# Altium PCB EDC_Power_Adapter.PcbDoc
Units mm, origin at the board's own origin, x right, y up, seen from the top; angles counter-clockwise.
Board outline 92.15 x 89.13 mm, 2 copper layers (Top Layer, Bottom Layer), stack 1.571 mm thick; 20 components, 13 nets, 146 pads, 0 vias.
Unrouted connection lines stored in the file: 40.
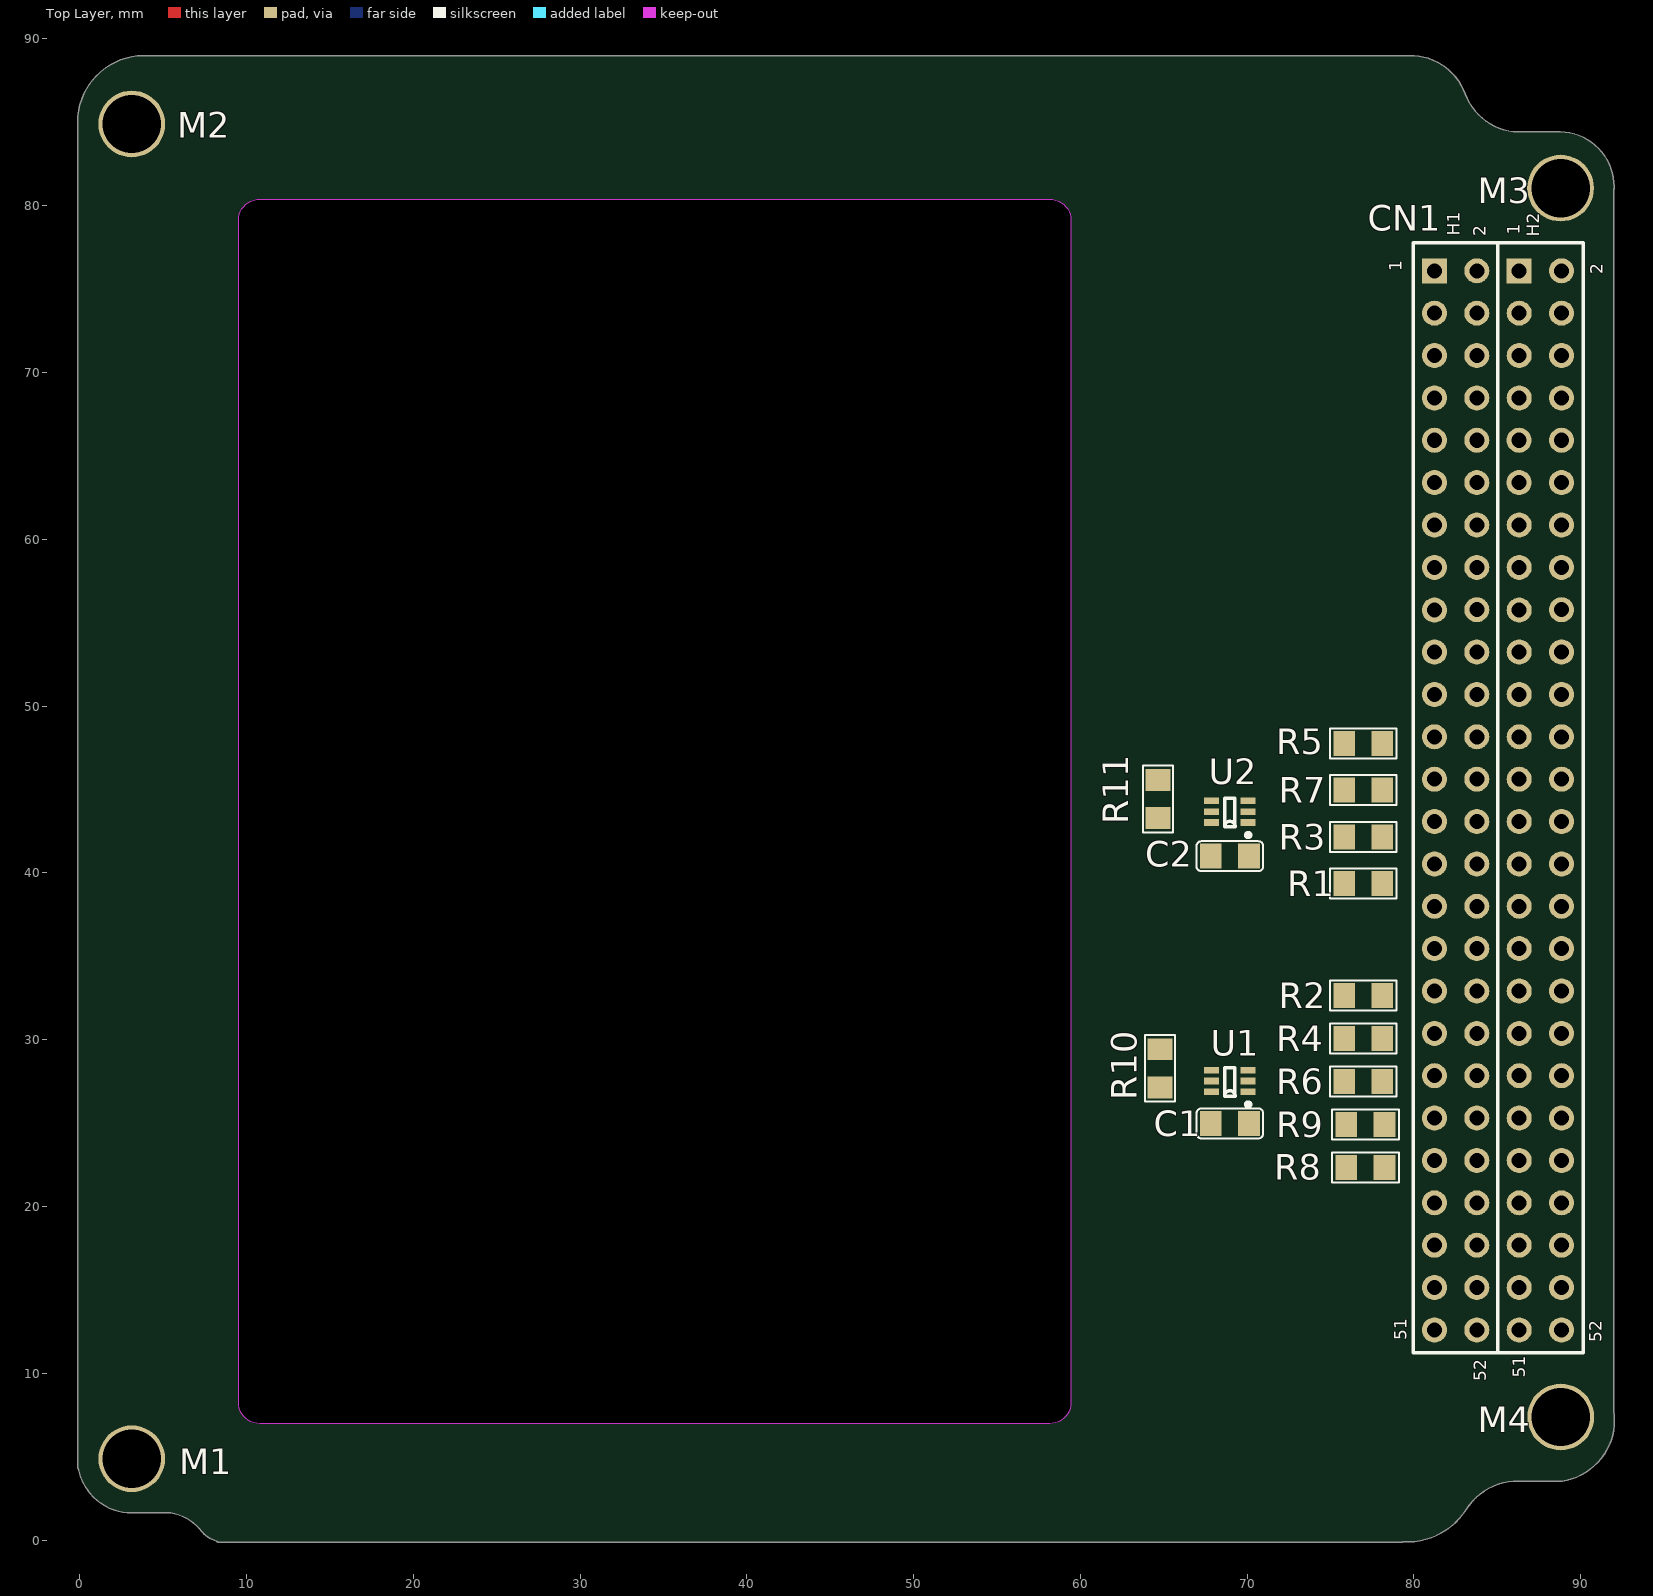
[diagram p0: Top Layer view]
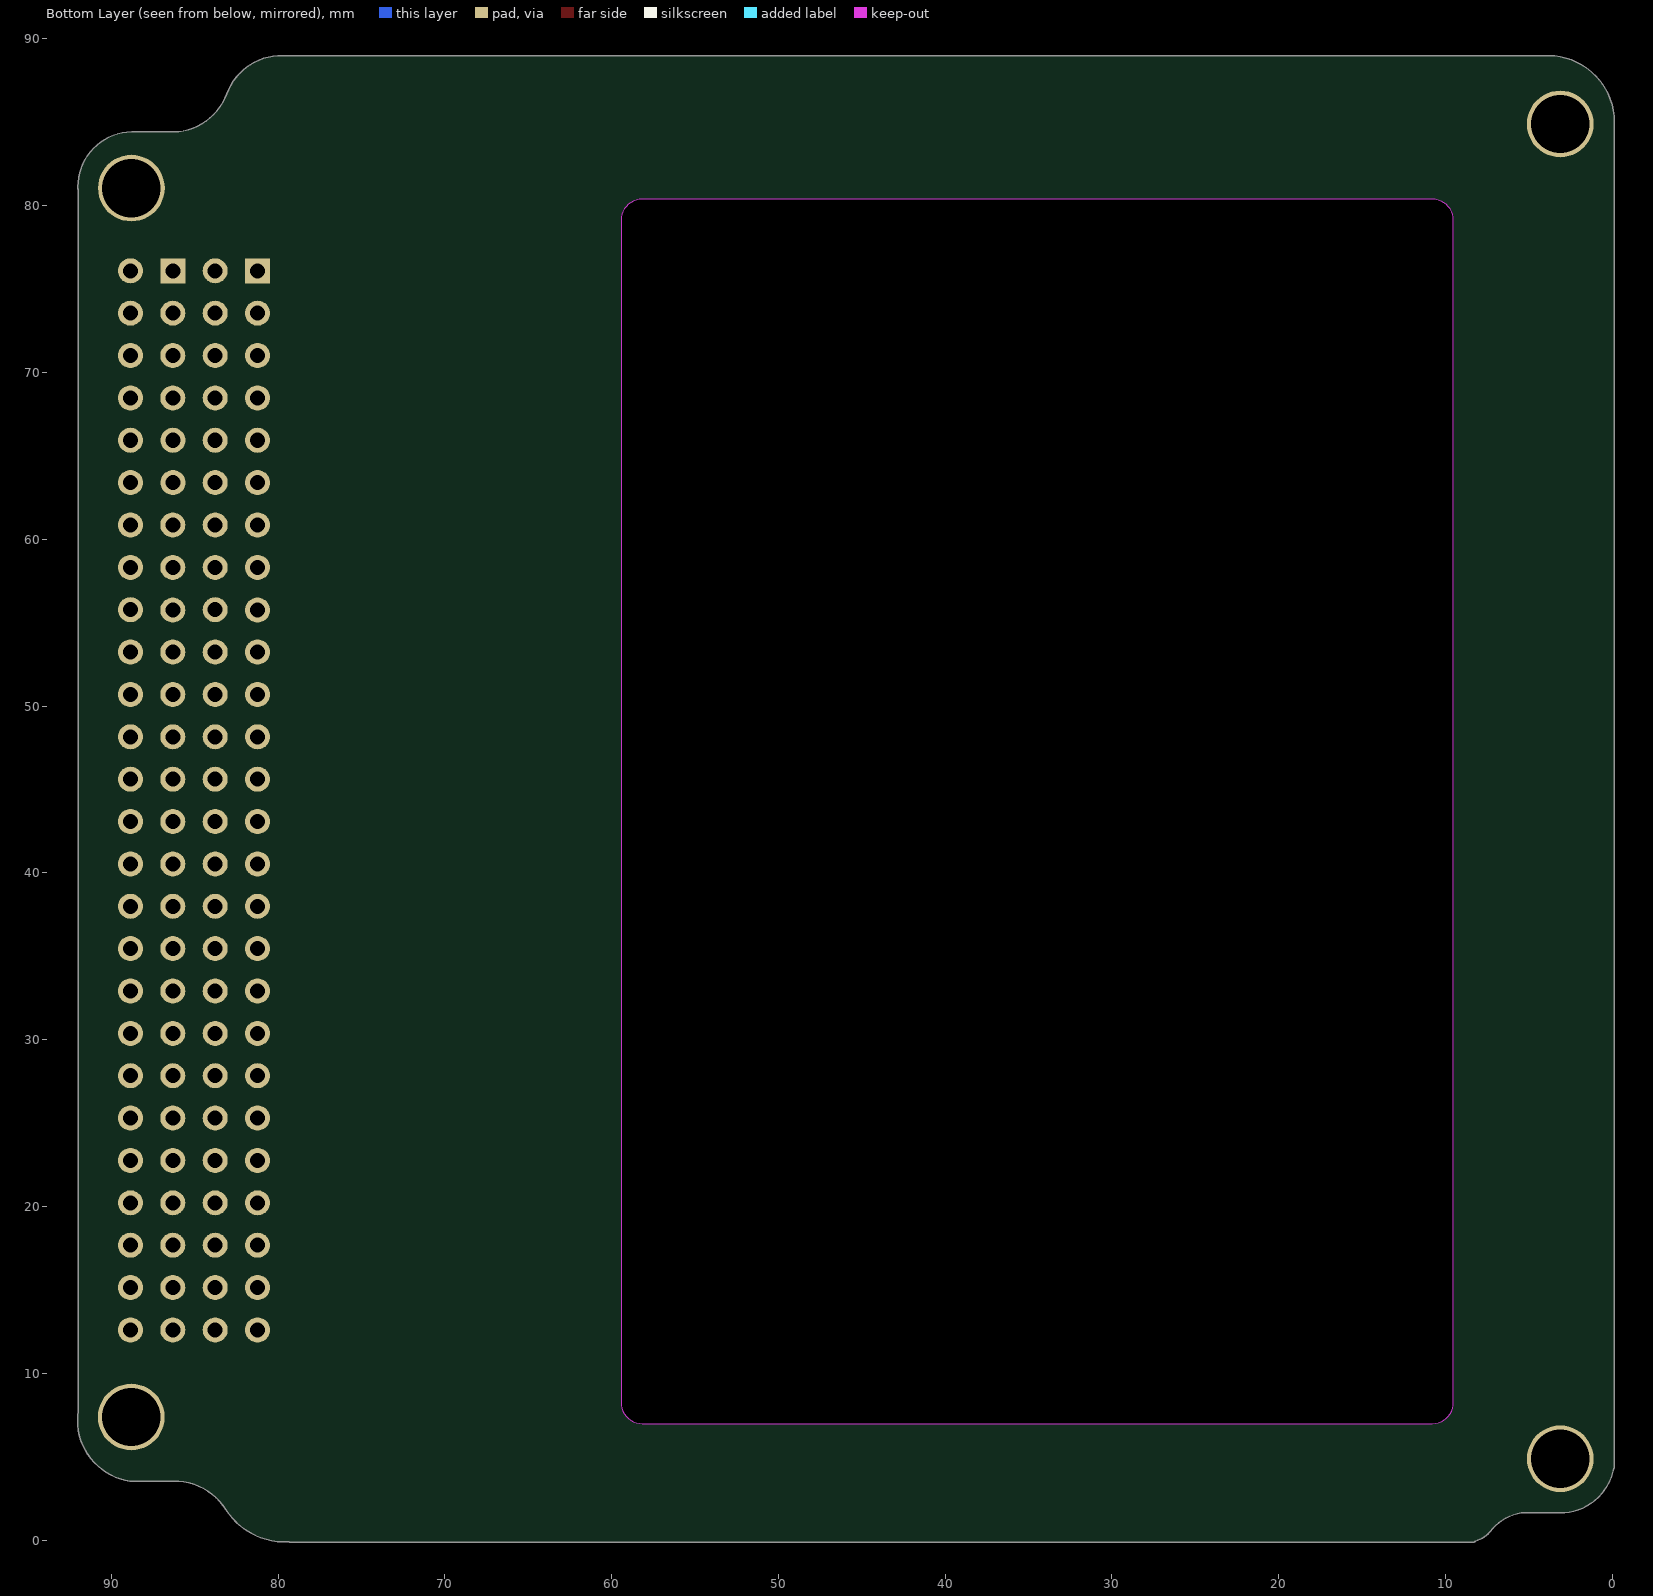
[diagram p1: Bottom Layer view, seen from below]

## Layer stack, top to bottom
Top Solder: solder mask 0.0102, Solder Resist, Dk 3.5
Top Layer: signal copper 0.0356
Dielectric 1: dielectric 1.5, FR-4, Dk 4.8
Bottom Layer: signal copper 0.0356
Bottom Solder: solder mask 0.0102, Solder Resist, Dk 3.5

## Board outline
7.336,0.495 ccw(c8.705,1.688) 8.218,-0.061 ccw(c8.33,0) 8.33,-0.127 8.683,-0.127 ccw(c8.705,1.688) 8.726,-0.127 ccw(c8.725,0) 8.727,-0.127 79.275,-0.127 ccw(c79.275,0) 79.349,-0.104 ccw(c79.59,4.086) 83.133,1.836 ccw(c83.025,1.904) 83.133,1.837 cw(c86.222,-0.119) 85.955,3.527 88.85,3.527 ccw(c88.85,3.654) 88.87,3.528 ccw(c88.316,7.191) 92.02,7.191 ccw(c88.316,7.191) 91.98,7.733 91.98,80.987 ccw(c91.875,81.059) 92.002,81.056 ccw(c88.702,81.132) 92.003,81.132 ccw(c88.702,81.132) 88.78,84.431 ccw(c88.775,84.304) 88.775,84.432 85.945,84.432 cw(c86.406,87.974) 83.069,86.699 cw(c86.406,87.974) 83.069,86.7 83.069,86.699 ccw(c79.778,85.507) 79.725,89.007 ccw(c79.778,85.507) 79.723,89.007 79.725,89.007 3.825,89.007 ccw(c3.825,88.879) 3.809,89.006 ccw(c3.802,88.878) 3.799,89.006 ccw(c3.879,85.004) -0.124,85.033 ccw(c0,85.004) -0.127,85.004 -0.127,4.39 ccw(c0,4.39) -0.073,4.286 ccw(c3.125,4.879) 3.151,1.627 ccw(c3.15,1.754) 3.152,1.627 5.464,1.627 cw(c4.981,-1.285) 7.331,0.502 ccw(c7.432,0.579)
cut-out: 9.525,8.255 9.525,79.121 cw(c10.795,79.121) 10.795,80.391 58.166,80.391 cw(c58.166,79.121) 59.436,79.121 59.436,8.255 cw(c58.166,8.255) 58.166,6.985 10.795,6.985 cw(c10.795,8.255)

## Design rules (kind name [scope] priority, off if disabled: settings)
Clearance [All] p1: gap=0.254 ignorepadtopadclearanceinfootprint=FALSE except(0: Arc-Hole Track-Hole SMDPad-Hole THPad-Hole Via-Hole Fill-Hole Poly-Hole Region-Hole Text-Hole)
PolygonConnect [All] p1: connectstyle=Relief reliefconductorwidth=0.254 reliefentries=4 polygonreliefangle="90 Angle" airgapwidth=0.254
RoutingVias [All] p1: holewidth=0.711 width=1.27 viastyle="Through Hole" minholewidth=0.711 minwidth=1.27 maxholewidth=0.711 maxwidth=1.27
SolderMaskExpansion SolderMaskExpansion_1 [All] p1: expansion=0.05 istentingtop=FALSE
SolderMaskExpansion [All] p2: expansion=0.102 istentingtop=FALSE
Width [All] p1: maxlimit=0.254 minlimit=0.254 preferedwidth=0.254
30 further rules are at their usual default settings.

## Classes and differential pairs
component class 1_Power_Switches: C1 C2 CN1 R1 R2 R3 R4 R5 R6 R7 R8 R9 R10 R11 S U1 U2
component class 0_Architecture: M1 M2 M3 M4

## Components (designator, comment, footprint, x,y, rotation, side; value= is the part's Value field where it differs from the comment)
C1 "4.7uF/25V" C0805_MD 68.961,24.98 r180 top
C2 "4.7uF/25V" C0805_MD 68.961,41.002 r180 top
CN1 "PC104" PC104_ESQ-126-39-G-D 85.037,44.35 r90 top
M1 "Mechanical hole 3.5mm" "Mechanical hole 3.5mm" 3.125,4.879 r0 top
M2 "Mechanical hole 3.5mm" "Mechanical hole 3.5mm" 3.125,84.904 r0 top
M3 "Mechanical hole 3.5mm" "Mechanical hole 3.5mm" 88.791,81.058 r0 top
M4 "Mechanical hole 3.5mm" "Mechanical hole 3.5mm" 88.8,7.379 r0 top
R1 "Optional 0805 resistor" R0805_MD 76.962,39.37 r180 top
R2 "Optional 0805 resistor" R0805_MD 76.962,32.639 r180 top
R3 "Optional 0805 resistor" R0805_MD 76.962,42.164 r180 top
R4 "Optional 0805 resistor" R0805_MD 76.962,30.067 r180 top
R5 "Optional 0805 resistor" R0805_MD 76.962,47.752 r180 top
R6 "Optional 0805 resistor" R0805_MD 76.962,27.495 r180 top
R7 "Optional 0805 resistor" R0805_MD 76.962,44.958 r180 top
R8 "Optional 0805 resistor" R0805_MD 77.089,22.352 r180 top
R9 "Optional 0805 resistor" R0805_MD 77.089,24.924 r180 top
R10 "Optional 0805 resistor" R0805_MD 64.77,28.282 r90 top
R11 "Optional 0805 resistor" R0805_MD 64.643,44.431 r90 top
U1 "Power Switch/Driver 1:1 N-Channel 1.5A" "6-TSSOP, SC-88, SOT-363" 68.961,27.52 r180 top
U2 "Power Switch/Driver 1:1 N-Channel 1.5A" "6-TSSOP, SC-88, SOT-363" 68.961,43.669 r180 top

## Footprints (in the part's own frame and the unit in brackets; to place one, negate y for a bottom-side part, rotate by r counter-clockwise, add the part's x,y. Pads: shape width x height; smd on the part's side, far side on the other; paste and mask are expansions set on the pad)
"6-TSSOP, SC-88, SOT-363" [mm]
  rect 0.9x0.4 smd: 1(-1.1,0.65) 2(-1.1,0) 3(-1.1,-0.65) 4(1.1,-0.65) 5(1.1,0) 6(1.1,0.65)
  silkscreen extent -1.23,-0.8 0.32,1.52, body extent -1.05,-1 1.05,1, height 1
C0805_MD [mm] "Chip Capacitor, Body 2.0x1.3mm, IPC Medium Density"
  rect 1.3x1.5 smd: 1(-1.143,0) 2(1.143,0)
  silkscreen extent -2,-0.9 2,0.9, body extent -1.25,-0.61 1.25,0.64, height 0.79
"Mechanical hole 3.5mm" [mm]
  round 4 hole 3.5 mask+0: 0(0,0)
PC104_ESQ-126-39-G-D [mm] "Connector; Header; 26x4 Position"
  rect 1.5x1.5 hole 0.9: H1-1(31.75,3.81) H2-1(31.75,-1.265)
  round 1.5 hole 0.9: H1-2(31.75,1.27) H1-3(29.21,3.81) H1-4(29.21,1.27) H1-5(26.67,3.81) H1-6(26.67,1.27) H1-7(24.13,3.81) H1-8(24.13,1.27) H1-9(21.59,3.81) H1-10(21.59,1.27) H1-11(19.05,3.81) H1-12(19.05,1.27) H1-13(16.51,3.81) H1-14(16.51,1.27) H1-15(13.97,3.81) H1-16(13.97,1.27) H1-17(11.405,3.81) H1-18(11.43,1.27) H1-19(8.89,3.81) H1-20(8.89,1.27) H1-21(6.35,3.81) H1-22(6.35,1.27) H1-23(3.81,3.81) H1-24(3.81,1.27) H1-25(1.27,3.81) H1-26(1.27,1.27) H1-27(-1.27,3.81) H1-28(-1.27,1.27) H1-29(-3.81,3.81) H1-30(-3.81,1.27) H1-31(-6.35,3.81) H1-32(-6.35,1.27) H1-33(-8.89,3.81) H1-34(-8.89,1.27) H1-35(-11.43,3.81) H1-36(-11.43,1.27) H1-37(-13.97,3.81) H1-38(-13.97,1.27) H1-39(-16.51,3.81) H1-40(-16.51,1.27) H1-41(-19.05,3.81) H1-42(-19.05,1.27) H1-43(-21.59,3.81) H1-44(-21.59,1.27) H1-45(-24.13,3.81) H1-46(-24.13,1.27) H1-47(-26.67,3.81) H1-48(-26.67,1.27) H1-49(-29.21,3.81) H1-50(-29.21,1.27) H1-51(-31.75,3.81) H1-52(-31.75,1.27) H2-2(31.75,-3.81) H2-3(29.21,-1.27) H2-4(29.21,-3.81) H2-5(26.67,-1.27) H2-6(26.67,-3.81) H2-7(24.13,-1.27) H2-8(24.13,-3.81) H2-9(21.59,-1.265) H2-10(21.59,-3.81) H2-11(19.05,-1.265) H2-12(19.05,-3.81) H2-13(16.51,-1.27) H2-14(16.51,-3.81) H2-15(13.97,-1.27) H2-16(13.97,-3.81) H2-17(11.405,-1.27) H2-18(11.43,-3.81) H2-19(8.89,-1.27) H2-20(8.89,-3.81) H2-21(6.35,-1.27) H2-22(6.35,-3.81) H2-23(3.81,-1.27) H2-24(3.81,-3.81) H2-25(1.27,-1.27) H2-26(1.27,-3.81) H2-27(-1.27,-1.27) H2-28(-1.27,-3.81) H2-29(-3.81,-1.27) H2-30(-3.81,-3.81) H2-31(-6.35,-1.27) H2-32(-6.35,-3.81) H2-33(-8.89,-1.27) H2-34(-8.89,-3.81) H2-35(-11.43,-1.27) H2-36(-11.43,-3.81) H2-37(-13.97,-1.27) H2-38(-13.97,-3.81) H2-39(-16.51,-1.27) H2-40(-16.51,-3.81) H2-41(-19.05,-1.27) H2-42(-19.05,-3.81) H2-43(-21.59,-1.27) H2-44(-21.59,-3.81) H2-45(-24.13,-1.27) H2-46(-24.13,-3.81) H2-47(-26.67,-1.27) H2-48(-26.67,-3.81) H2-49(-29.21,-1.27) H2-50(-29.21,-3.81) H2-51(-31.75,-1.27) H2-52(-31.75,-3.81)
  silkscreen extent -33.13,-5.11 33.43,5.08, body extent -33.27,-5.07 33.28,5.07, height 11.06
R0805_MD [mm] "Chip Resistor, Body 2.0x1.3mm, IPC Medium Density"
  rect 1.3x1.5 smd: 1(-1.143,0) 2(1.143,0)
  silkscreen extent -2,-0.9 2,0.9, body extent -1,-0.62 1,0.63, height 0.47

## Part data
C1 C2: library part C2012X7R1E475K125AB, "TDK C2012X7R1E475K125AB SMD Multilayer Ceramic Capacitor, 0805 [2012 Metric], 4.7uF, 25 V,  10%, X7R, C Series", Capacitance=4.7uF, Case Code (Imperial)=0805, Case Code (Metric)=2012, Dielectric=X7R, Dielectric Material=Ceramic, Manufacturer=TDK, Max Operating Temperature=125°C, Min Operating Temperature=-55°C, Package Quantity=2000, Supplier Part Number 1=445-5972-1-ND, Tolerance=10%, Voltage=25V, Case/Package=0805, Category="Ceramic Capacitors", ComponentLink1Description=https://datasheet.ciiva.com/24216/c2012x7r1e475k125ab-265069-24216552.pdf?src-supplier=Mouser, ComponentLink1URL=https://datasheet.ciiva.com/24216/c2012x7r1e475k125ab-265069-24216552.pdf?src-supplier=Mouser, ComponentLink2Description=https://datasheet.ciiva.com/6287/tdkmlcccaprange-6287482.pdf?src-supplier=Digi-Key, ComponentLink2URL=https://datasheet.ciiva.com/6287/tdkmlcccaprange-6287482.pdf?src-supplier=Digi-Key, ComponentLink3Description=https://datasheet.ciiva.com/23803/1796654-23803034.pdf?src-supplier=Newark, ComponentLink3URL=https://datasheet.ciiva.com/23803/1796654-23803034.pdf?src-supplier=Newark, ComponentLink4Description=https://datasheet.ciiva.com/17487/e412-c-17487246.pdf?src-supplier=Avnet+Europe, ComponentLink4URL=https://datasheet.ciiva.com/17487/e412-c-17487246.pdf?src-supplier=Avnet+Europe, Composition=Ceramic, Depth=1.25mm, Height=1.25mm, Lead Free="Lead Free", Length=2mm, Manufacturer Part Number=C2012X7R1E475K125AB, Mount="Surface Mount", Packaging="Tape and Reel", Pricing 1="1=0,52000, 10=0,36300, 50=0,25420, 100=0,21790, 500=0,16344, 1000=0,13802 (USD)", Radiation Hardening=No, REACH SVHC="No SVHC", RoHS=Yes, Stock 1=157436, Supplier 1=Digi-Key, Termination=SMD/SMT, Thickness=0.057inch, Voltage Rating=25V, Voltage Rating (DC)=25V, Weight=0.000194oz, Width=0.049inch
CN1: library part PC104_ESQ-126-39-G-D, "Conn Elevated Socket SKT 52 POS 2.54mm Solder ST Thru-Hole Tube", Contact Resistance=10mR, Housing Color=Black, Manufacturer=Samtec, Manufacturer Part Number=ESQ-126-39-G-D, Max Current Rating=6.9A, Max Operating Temperature=125°C, Max Voltage Rating (AC)=550V, Min Operating Temperature=-55°C, Supplier Part Number 1=SAM10462-ND, Category="Headers and Wire Housings", ComponentLink1Description=http://components.arrow.com/part/dataview/0323_04347945?src-supplier=Arrow+Europe, ComponentLink1URL=http://components.arrow.com/part/dataview/0323_04347945?src-supplier=Arrow+Europe, ComponentLink2Description=http://www.farnell.com/datasheets/2571080.pdf?src-supplier=Newark, ComponentLink2URL=http://www.farnell.com/datasheets/2571080.pdf?src-supplier=Newark, ComponentLink3Description=http://suddendocs.samtec.com/prints/esq-sdt.pdf?src-supplier=Digi-Key, ComponentLink3URL=http://suddendocs.samtec.com/prints/esq-sdt.pdf?src-supplier=Digi-Key, ComponentLink4Description=http://cloud.samtec.com/catalog_english/ESW_TH.PDF?src-supplier=Avnet, ComponentLink4URL=http://cloud.samtec.com/catalog_english/ESW_TH.PDF?src-supplier=Avnet, Contact Material=Bronze, Contact Plating=Gold, Depth=4.95mm, Gender=Female, Housing Material=Polyester, Length=66.55mm, Number of Contacts=52, Number of Rows=2, Orientation=Straight, Packaging=Rail/Tube, Partnumber=ESQ-126-39-G-D, Pitch=2.54mm, Pricing 1="1=11,66000, 10=10,60000, 100=9,01000, 500=7,68500, 1000=7,04900, 5000=6,89000 (USD)", Radiation Hardening=No, RoHS=Yes, Stock 1=554, Supplier 1=Digi-Key, Termination=Solder
R1 R2 R3 R4 R5 R6 R7 R8 R9 R10 R11: library part CRCW08050000Z0EA, "VISHAY - CRCW08050000Z0EA - SMD Chip Resistor, Jumper, 0805 [2012 Metric], 0 ohm, CRCW e3 Series, 150 V, Thick Film, 125 mW", Case Code (Imperial)=0805, Case Code (Metric)=2012, Manufacturer=Vishay, Max Operating Temperature=155°C, Max Power Dissipation=125mW, Min Operating Temperature=-55°C, Package Quantity=1, Resistance=0mR, Supplier Part Number 1=541-0.0ACT-ND, Temperature Coefficient=100ppm/°C, Tolerance=1%, Voltage Rating=150V, Case/Package=0805, Category="Chip SMD Resistors", ComponentLink1Description=https://datasheet.ciiva.com/11811/0900766b80d98b26-11811304.pdf?src-supplier=RSComponents, ComponentLink1URL=https://datasheet.ciiva.com/11811/0900766b80d98b26-11811304.pdf?src-supplier=RSComponents, ComponentLink2Description=https://datasheet.ciiva.com/16883/dcrcwe3-16883622.pdf?src-supplier=Avnet+Europe, ComponentLink2URL=https://datasheet.ciiva.com/16883/dcrcwe3-16883622.pdf?src-supplier=Avnet+Europe, ComponentLink3Description=https://datasheet.ciiva.com/26314/fld-crcw-e3-data-en-26314630.pdf?src-supplier=Distrelec, ComponentLink3URL=https://datasheet.ciiva.com/26314/fld-crcw-e3-data-en-26314630.pdf?src-supplier=Distrelec, ComponentLink4Description=https://datasheet.ciiva.com/5543/dcrcwe3-109170-5543096.pdf?src-supplier=Mouser, ComponentLink4URL=https://datasheet.ciiva.com/5543/dcrcwe3-109170-5543096.pdf?src-supplier=Mouser, ComponentLink5Description=https://datasheet.ciiva.com/16389/dcrcwe3-16389338.pdf?src-supplier=Future+Electronics, ComponentLink5URL=https://datasheet.ciiva.com/16389/dcrcwe3-16389338.pdf?src-supplier=Future+Electronics, ComponentLink6Description=https://datasheet.ciiva.com/16719/70201119-16719706.pdf?src-supplier=Allied+Electronics, ComponentLink6URL=https://datasheet.ciiva.com/16719/70201119-16719706.pdf?src-supplier=Allied+Electronics, ComponentLink7Description=https://datasheet.ciiva.com/2463/dcrcwe3-2463037.pdf?src-supplier=Digi-Key, ComponentLink7URL=https://datasheet.ciiva.com/2463/dcrcwe3-2463037.pdf?src-supplier=Digi-Key, ComponentLink8Description=https://datasheet.ciiva.com/7841/1697337-7841629.pdf?src-supplier=Element14, ComponentLink8URL=https://datasheet.ciiva.com/7841/1697337-7841629.pdf?src-supplier=Element14, ComponentLink9Description=https://datasheet.ciiva.com/2463/dcrcwe3-2463038.pdf?src-supplier=Digi-Key, ComponentLink9URL=https://datasheet.ciiva.com/2463/dcrcwe3-2463038.pdf?src-supplier=Digi-Key, ComponentLink10Description=https://datasheet.ciiva.com/2463/dcrcwe3-2463039.pdf?src-supplier=Digi-Key, ComponentLink10URL=https://datasheet.ciiva.com/2463/dcrcwe3-2463039.pdf?src-supplier=Digi-Key, ComponentLink11Description=https://datasheet.ciiva.com/7841/1720486-7841839.pdf?src-supplier=Element14, ComponentLink11URL=https://datasheet.ciiva.com/7841/1720486-7841839.pdf?src-supplier=Element14, Composition="Thick Film", Contact Plating=Tin,Lead, Depth=1.25mm, Features="Automotive AEC-Q200", Height=0.45mm, Lead Free="Lead Free", Length=2mm, Manufacturer Part Number=CRCW08050000Z0EA, Military Standard=Not, Number of Terminations=2, Packaging="Tape and Reel", Power Rating=125mW, Pricing 1="1=0,10000, 10=0,03800, 25=0,02800, 50=0,02120, 100=0,01560, 250=0,01192, 500=0,00954, 1000=0,00702 (USD)", Radiation Hardening=No, REACH SVHC=Unknown, RoHS=Yes, Stock 1=326656, Supplier 1=Digi-Key, Termination=SMD/SMT, Voltage Rating (DC)=150V, Weight=0.000194oz, Width=1.25mm
U1 U2: library part TPS22919DCKR, "5.5-V, 1.5-A, 90-mΩ load switch with adj. output discharge 6-SC70 -40 to 105", Manufacturer="Texas Instruments", Supplier Part Number 1=296-TPS22919DCKRCT-ND, Manufacturer Part Number=TPS22919DCKR, Pricing 1="1=0,48000, 10=0,36000, 25=0,31480, 100=0,17990, 250=0,16864, 500=0,13492, 1000=0,10343 (USD)", RoHS=No, Stock 1=7943, Supplier 1=Digi-Key

## Nets (pads, with @x,y where several pads share a name; then routed paths per layer and width w, separated by ;. In a path a pad name is that pad's centre, name@x,y a point inside that pad or via, vN(x,y) a via of type N, cw(c..) or ccw(c..) an arc to the next point about the centre after c; other vN are vias at no path point)
5V_Payload: C1.1 C2.1 CN1.H1-47 CN1.H1-48 U1.1 U2.1
ADD_OPT_GPIO0: CN1.H2-18 R1.1 R2.1
ADD_OPT_GPIO1: CN1.H2-20 R3.1 R4.1
ADD_OPT_GPIO2: CN1.H2-22 R5.1 R6.1
ADD_OPT_GPIO3: CN1.H2-42 R7.1 R8.1
EDC_1_ENABLE: CN1.H1-18 R1.2 R3.2 R5.2 R7.2 U2.3
EDC_1_POWER: CN1.H1-44 R11.1 U2.6
EDC_2_ENABLE: R2.2 R4.2 R6.2 R8.2 R9.2 U1.3
EDC_2_POWER: CN1.H1-42 R10.1 U1.6
GND: C1.2 C2.2 CN1.H1-29 CN1.H1-30 CN1.H1-31 CN1.H1-32 CN1.H2-29 CN1.H2-30 CN1.H2-31 U1.2 U2.2
NetR10_2: R10.2 U1.5
NetR11_2: R11.2 U2.5
PAYLOAD_X_ENABLE: CN1.H1-20 R9.1
pads on no net: CN1.H1-1 CN1.H1-2 CN1.H1-3 CN1.H1-4 CN1.H1-5 CN1.H1-6 CN1.H1-7 CN1.H1-8 CN1.H1-9 CN1.H1-10 CN1.H1-11 CN1.H1-12 CN1.H1-13 CN1.H1-14 CN1.H1-15 CN1.H1-16 CN1.H1-17 CN1.H1-19 CN1.H1-21 CN1.H1-22 CN1.H1-23 CN1.H1-24 CN1.H1-25 CN1.H1-26 CN1.H1-27 CN1.H1-28 CN1.H1-33 CN1.H1-34 CN1.H1-35 CN1.H1-36 CN1.H1-37 CN1.H1-38 CN1.H1-39 CN1.H1-40 CN1.H1-41 CN1.H1-43 CN1.H1-45 CN1.H1-46 CN1.H1-49 CN1.H1-50 CN1.H1-51 CN1.H1-52 CN1.H2-1 CN1.H2-2 CN1.H2-3 CN1.H2-4 CN1.H2-5 CN1.H2-6 CN1.H2-7 CN1.H2-8 CN1.H2-9 CN1.H2-10 CN1.H2-11 CN1.H2-12 CN1.H2-13 CN1.H2-14 CN1.H2-15 CN1.H2-16 CN1.H2-17 CN1.H2-19 CN1.H2-21 CN1.H2-23 CN1.H2-24 CN1.H2-25 CN1.H2-26 CN1.H2-27 CN1.H2-28 CN1.H2-32 CN1.H2-33 CN1.H2-34 CN1.H2-35 CN1.H2-36 CN1.H2-37 CN1.H2-38 CN1.H2-39 CN1.H2-40 CN1.H2-41 CN1.H2-43 CN1.H2-44 CN1.H2-45 CN1.H2-46 CN1.H2-47 CN1.H2-48 CN1.H2-49 CN1.H2-50 CN1.H2-51 CN1.H2-52 M1.0 M2.0 M3.0 M4.0 U1.4 U2.4

## Silkscreen, mask and mechanical layers (free items; w line width, h text height)
Mechanical 1:
  lines w0.254: 0,4.39 0,85.004 ; 0,4.854 ccw(c3.125,4.879) 3.15,1.754 5.475,1.754 cw(c4.981,-1.285) 7.432,0.579 ccw(c8.705,1.688) 8.725,0 ; 0.004,84.927 cw(c3.879,85.004) 3.802,88.878 ; 3.825,88.879 79.725,88.879 cw(c79.778,85.507) 82.95,86.654 ccw(c86.406,87.974) 85.937,84.304 88.775,84.304 cw(c88.702,81.132) 91.875,81.059 ; 8.33,0 79.275,0 ; 79.277,0.029 ccw(c79.59,4.086) 83.025,1.904 cw(c86.222,-0.119) 85.95,3.654 88.85,3.654 ccw(c88.316,7.191) 91.853,7.724 91.853,81.132 ; 9.525,8.255 ccw(c10.795,8.255) 10.795,6.985 58.166,6.985 ccw(c58.166,8.255) 59.436,8.255 59.436,79.121 ccw(c58.166,79.121) 58.166,80.391 10.795,80.391 ccw(c10.795,79.121) 9.525,79.121 9.525,11.557 9.525,8.255

## Text inside footprints (layer, text, board x,y; h text height)
CN1: Top Overlay "H1" at 82.747,78.19 h0.75 r90; Top Overlay "H2" at 87.517,78.13 h0.75 r90; Top Overlay "52" at 84.327,9.53 h0.75 r90; Top Overlay "51" at 79.567,11.98 h0.75 r90; Top Overlay "51" at 86.677,9.72 h0.75 r90; Top Overlay "52" at 91.267,11.86 h0.75 r90; Top Overlay "1" at 79.267,76.07 h0.75 r90; Top Overlay "2" at 84.317,78.16 h0.75 r90; Top Overlay "2" at 91.307,75.88 h0.75 r90; Top Overlay "1" at 86.327,78.25 h0.75 r90